# Altium PCB football_main_board_2016.PcbDoc
Units mm, origin at the board's own origin, x right, y up, seen from the top; angles counter-clockwise.
Board outline 100 x 50 mm, 2 copper layers (Top Layer, Bottom Layer), stack 1.571 mm thick; 106 components, 109 nets, 506 pads, 354 vias.
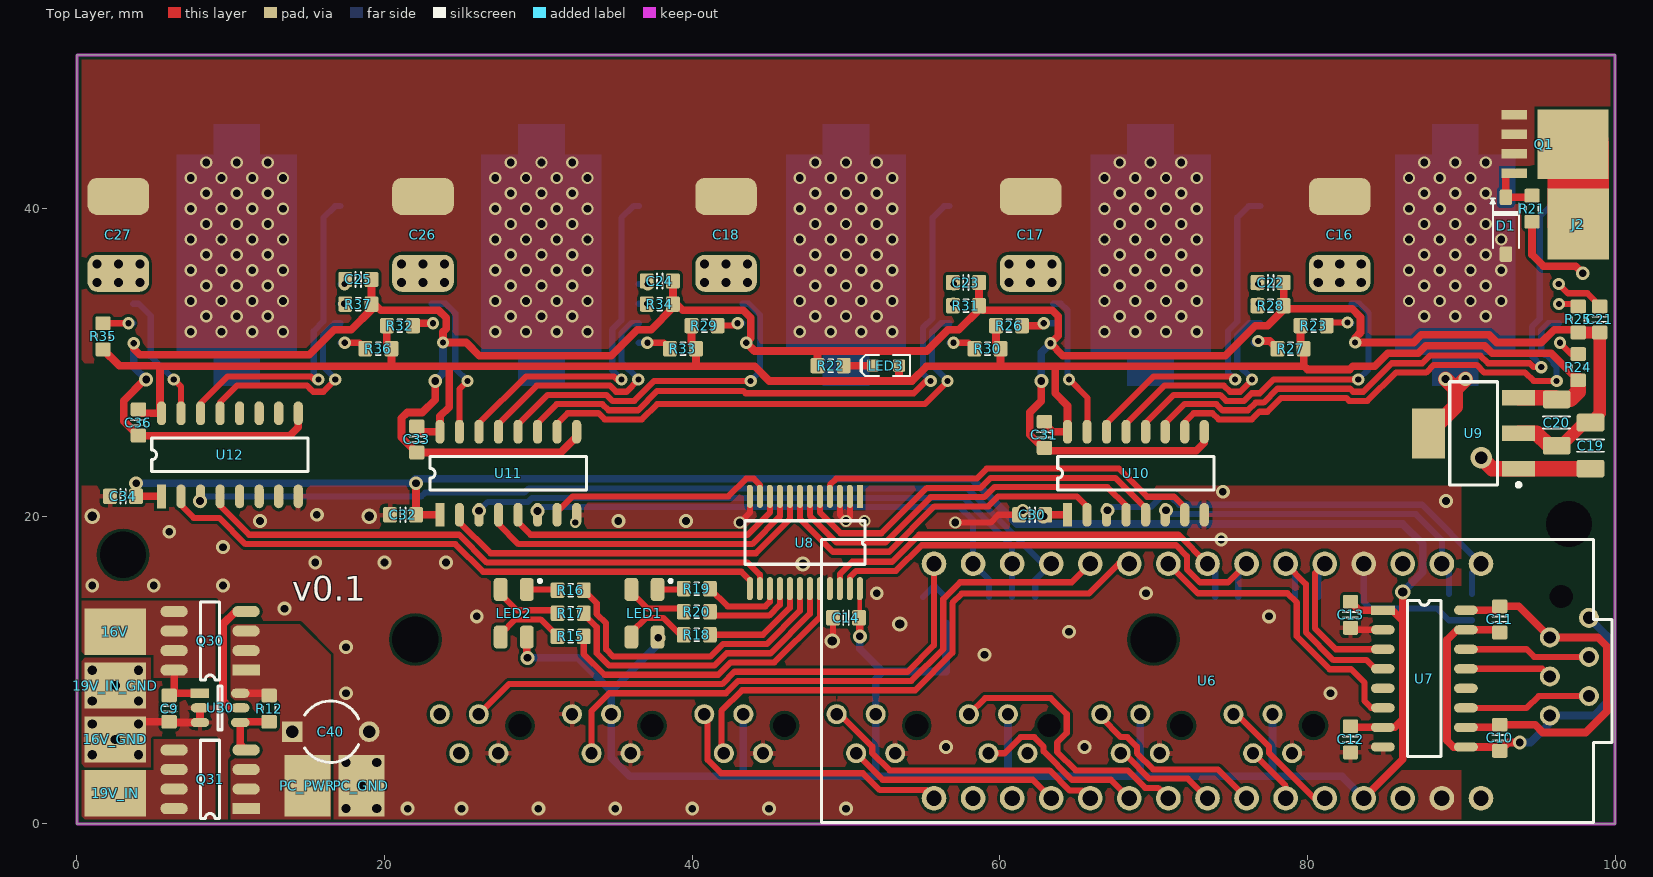
[diagram p0: Top Layer view]
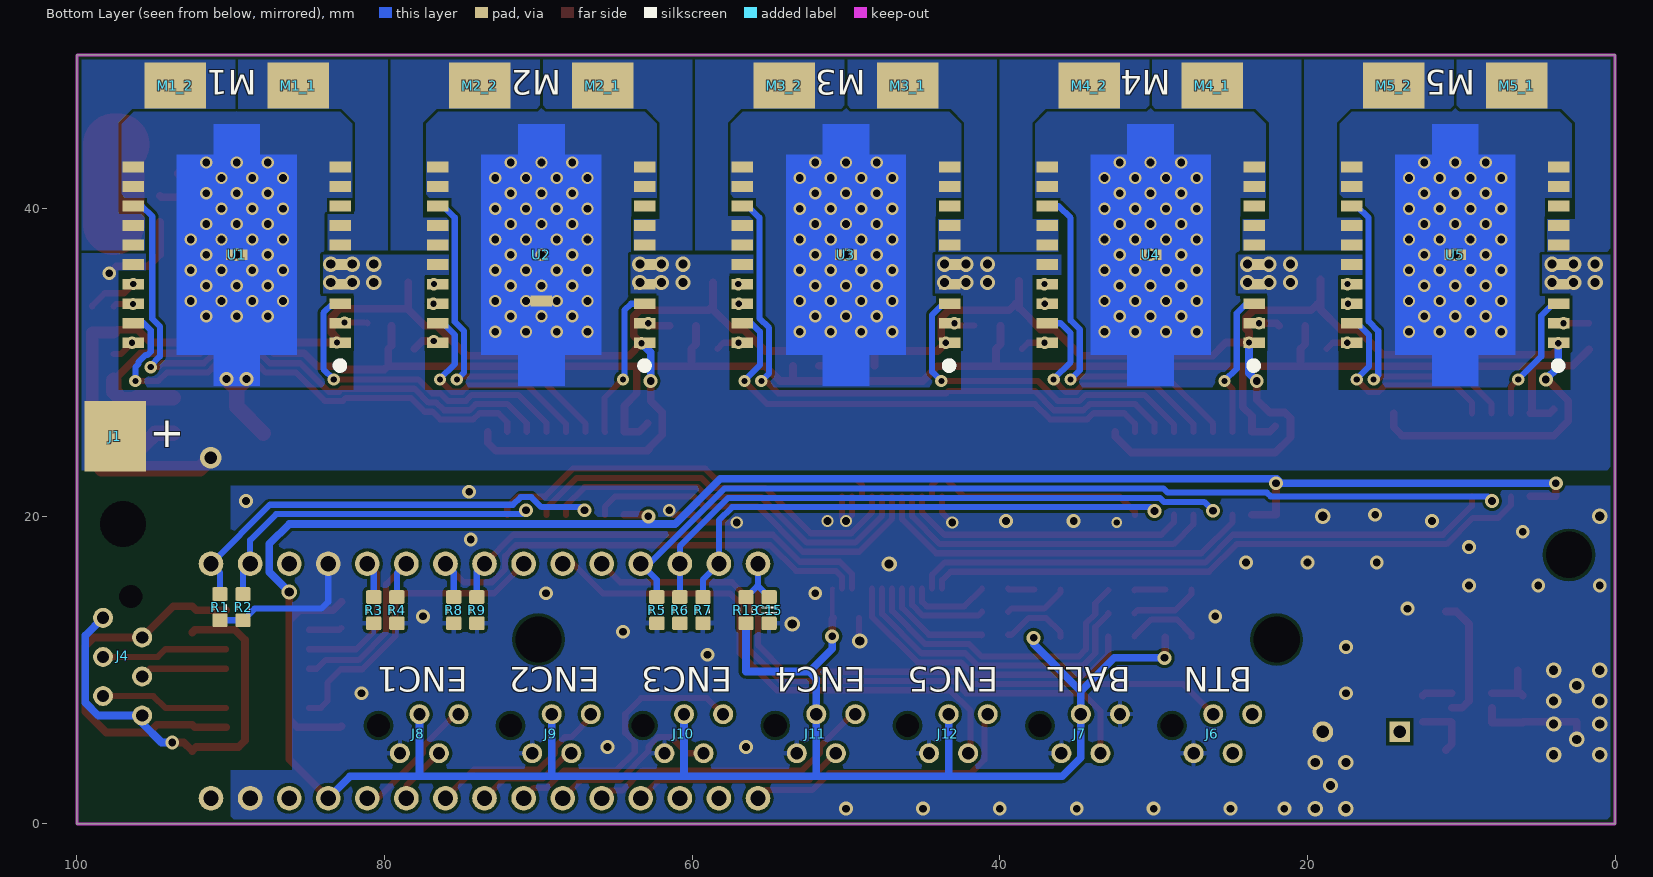
[diagram p1: Bottom Layer view, seen from below]

## Layer stack, top to bottom
Top Solder: solder mask 0.0102, Solder Resist, Dk 3.5
Top Layer: signal copper 0.0356
Dielectric 1: dielectric 1.5, FR-4, Dk 4.8
Bottom Layer: signal copper 0.0356
Bottom Solder: solder mask 0.0102, Solder Resist, Dk 3.5

## Board outline
0,0 100,0 100,50 0,50

## Design rules (kind name [scope] priority, off if disabled: settings)
Clearance [All] p1: gap=0.2
ComponentClearance ComponentClearanceIgnore [InComponent('U6') or InComponent('C40')] p1: gap=0 collisioncheckmode=3 verticalgap=0 showdistances=FALSE
ComponentClearance [All] p2: gap=0.2 collisioncheckmode=3 verticalgap=0.2 showdistances=FALSE
HoleSize [All] p1: absolutevalues=TRUE maxlimit=6 minlimit=0.3 maxpercent=80.000 minpercent=20.000
PolygonConnect DirectConnectPolygons [IsVia or InNet('NetM1_1_1') or InNet('NetM1_2_1') or InNet('NetM2_1_1') or InNet('NetM2_2_1') or InNet('NetM3_1_1') or InNet('NetM3_2_1') or InNet('NetM4_1_1') or InNet('NetM4_2_1') or InNet('NetM5_1_1') or InNet('NetM5_2_1') or InNet('12V') or InNet('PGND')or InNet('PC_PWR') or InNet('Net16V_1') or InNet('Net19V_IN_1') or InComponent('16V_GND') or InComponent('19V_IN_GND') or InComponent('PC_GND') or InComponent('C40') or InComponent('U6')] p1: connectstyle=Direct reliefconductorwidth=0.254 reliefentries=4 polygonreliefangle="90 Angle" airgapwidth=0.254
PolygonConnect [All] p2: connectstyle=Relief reliefconductorwidth=0.3 reliefentries=4 polygonreliefangle="90 Angle" airgapwidth=0.2
RoomDefinition football_main_board_2016 [InComponentClass('football_main_board_2016')] p1: confinementstyle=ConfineIn formatcopy=TRUE lockcomponents=FALSE outline 0,0 100,0 100,100 0,100
RoutingVias [All] p1: holewidth=0.4 width=0.8 viastyle="Through Hole" minholewidth=0.3 minwidth=0.6 maxholewidth=4 maxwidth=3
SolderMaskExpansion [All] p1: expansion=0.102
Width [All] p1: maxlimit=10 minlimit=0.2 preferedwidth=0.4
28 further rules are at their usual default settings.

## Components (designator, comment, footprint, x,y, rotation, side; value= is the part's Value field where it differs from the comment)
16V "HEADER-1" POWER-PAD-4x3#1 2.5,12.5 r180 top
16V_GND "HEADER-1" POWER-PAD-4x3#1 2.5,5.5 r0 top
19V_IN "HEADER-1" POWER-PAD-4x3#1 2.5,2 r0 top
19V_IN_GND "HEADER-1" POWER-PAD-4x3#1 2.5,9 r180 top
C9 "100n" CAPC1608X90N 6,7.5 r270 top
C10 "100n" CAPC1608X90N 92.5,5.6 r270 top
C11 "100n" CAPC1608X90N 92.5,13.3 r270 top
C12 "100n" CAPC1608X90N 82.8,5.5 r90 top
C13 "100n" CAPC1608X90N 82.8,13.6 r270 top
C14 "100n" CAPC1608X90N 50,13.4 r0 top
C15 "100n" CAPC1608X90N 55,13.9 r270 bottom
C16 "470u" CAP-LEADED-SMD-5 82.1,35.8 r180 top
C17 "470u" CAP-LEADED-SMD-5 62,35.8 r180 top
C18 "470u" CAP-LEADED-SMD-5 42.2,35.8 r180 top
C19 "10u" CAPC3216X180N 98.4,24.6 r90 top
C20 "10u" CAPC3216X180N 96.2,26.1 r270 top
C21 "1u" CAPC1608X90N 99,32.8 r270 top
C22 "1u" CAPC1608X90N 77.6,35.2 r0 top
C23 "1u" CAPC1608X90N 57.8,35.2 r0 top
C24 "1u" CAPC1608X90N 37.9,35.3 r0 top
C25 "1u" CAPC1608X90N 18.3,35.4 r0 top
C26 "470u" CAP-LEADED-SMD-5 22.5,35.8 r180 top
C27 "470u" CAP-LEADED-SMD-5 2.7,35.8 r180 top
C30 "100n" CAPC1608X90N 62.1,20.1 r180 top
C31 "100n" CAPC1608X90N 62.9,25.3 r270 top
C32 "100n" CAPC1608X90N 21.2,20.1 r180 top
C33 "100n" CAPC1608X90N 22.1,25 r270 top
C34 "100n" CAPC1608X90N 3,21.3 r180 top
C36 "100n" CAPC1608X90N 4,26.1 r270 top
C40 "470uF" CAPR5-4X5 16.5,6 r0 top
D1 "12V" SOD123 92.9,38.9 r270 top
J1 "12V_IN" POWER-PAD 97.5,25.2 r180 bottom
J2 "GND_IN" POWER-PAD 97.6,39 r180 top
J4 "COIL" MICRO-MATCH-6 98.3,13.4 r90 bottom
J6 "BTNS" MICRO-MATCH-4 27.4,4.6 r0 bottom
J7 "BALL" MICRO-MATCH-4 36,4.6 r0 bottom
J8 "ENC1" MICRO-MATCH-4 79,4.6 r0 bottom
J9 "ENC2" MICRO-MATCH-4 70.4,4.6 r0 bottom
J10 "ENC3" MICRO-MATCH-4 61.8,4.6 r0 bottom
J11 "ENC4" MICRO-MATCH-4 53.2,4.6 r0 bottom
J12 "ENC5" MICRO-MATCH-4 44.6,4.6 r0 bottom
LED1 "RGB-LED" RGB-LED 36.9,13.7 r270 top
LED2 "RGB-LED" RGB-LED 28.4,13.7 r270 top
LED3 "Green" LED-0603-GREEN 52.6,29.8 r180 top
M1_1 "HEADER-1" POWER-PAD-4x3#2 80.3,48.8 r180 bottom
M1_2 "HEADER-1" POWER-PAD-4x3#3 93.6,47.7 r180 bottom
M2_1 "HEADER-1" POWER-PAD-4x3#4 62,48 r180 bottom
M2_2 "HEADER-1" POWER-PAD-4x3#5 72.7,47.8 r0 bottom
M3_1 "HEADER-1" POWER-PAD-4x3#6 47.7,48.1 r180 bottom
M3_2 "HEADER-1" POWER-PAD-4x3#7 54.3,47.9 r0 bottom
M4_1 "HEADER-1" POWER-PAD-4x3#8 27.2,47.4 r180 bottom
M4_2 "HEADER-1" POWER-PAD-4x3#9 33.9,48 r0 bottom
M5_1 "HEADER-1" POWER-PAD-4x3#10 7.7,48 r180 bottom
M5_2 "HEADER-1" POWER-PAD-4x3#11 13.2,47.9 r0 bottom
PC_GND "HEADER-1" POWER-PAD-4x3#1 18.5,2.5 r270 top
PC_PWR "HEADER-1" POWER-PAD-4x3#1 15,2.5 r270 top
Q1 "MOSFET-N" SOT669 96.1,44.2 r0 top
Q30 "PMOS" SO8 11,10 r180 top
Q31 "PMOS" SO8 11,1 r180 top
R1 "10k" RESC1608X55N 90.7,14.1 r90 bottom
R2 "10k" RESC1608X55N 89.2,14.1 r90 bottom
R3 "10k" RESC1608X55N 80.7,13.9 r90 bottom
R4 "10k" RESC1608X55N 79.2,13.9 r90 bottom
R5 "10k" RESC1608X55N 62.3,13.9 r90 bottom
R6 "10k" RESC1608X55N 60.8,13.9 r90 bottom
R7 "10k" RESC1608X55N 59.3,13.9 r90 bottom
R8 "2k2" RESC1608X55N 75.5,13.9 r90 bottom
R9 "2k2" RESC1608X55N 74,13.9 r90 bottom
R12 "470k" RESC1608N_ZERO 12.5,7.5 r270 top
R13 "10k" RESC1608N_ZERO 56.5,13.9 r270 bottom
R15 "1k" RESC1608N_ZERO 32.1,12.2 r0 top
R16 "1k" RESC1608N_ZERO 32.1,15.2 r0 top
R17 "1k" RESC1608N_ZERO 32.1,13.7 r0 top
R18 "1k" RESC1608N_ZERO 40.3,12.3 r0 top
R19 "1k" RESC1608N_ZERO 40.3,15.3 r0 top
R20 "1k" RESC1608N_ZERO 40.3,13.8 r0 top
R21 "100k" RESC1608X55N 94.6,40 r90 top
R22 "2k2" RESC1608X55N 49,29.8 r180 top
R23 "10k" RESC1608X55N 80.4,32.4 r0 top
R24 "10k" RESC1608X55N 97.6,29.7 r90 top
R25 "10k" RESC1608X55N 97.6,32.8 r270 top
R26 "10k" RESC1608X55N 60.6,32.4 r0 top
R27 "10k" RESC1608X55N 78.9,30.9 r180 top
R28 "10k" RESC1608X55N 77.6,33.7 r0 top
R29 "10k" RESC1608X55N 40.8,32.4 r0 top
R30 "10k" RESC1608X55N 59.2,30.9 r180 top
R31 "10k" RESC1608X55N 57.8,33.7 r0 top
R32 "10k" RESC1608X55N 21,32.4 r0 top
R33 "10k" RESC1608X55N 39.4,30.9 r180 top
R34 "10k" RESC1608X55N 37.9,33.8 r0 top
R35 "10k" RESC1608X55N 1.7,31.7 r90 top
R36 "10k" RESC1608X55N 19.6,30.9 r180 top
R37 "10k" RESC1608X55N 18.3,33.8 r0 top
U1 "MC33886" MC33886#1 89.6,37 r0 bottom
U2 "MC33886" MC33886#2 69.8,37 r0 bottom
U3 "MC33886" MC33886#1 50,37 r0 bottom
U4 "MC33886" MC33886#1 30.2,37 r0 bottom
U5 "MC33886" MC33886#1 10.4,37 r0 bottom
U6 "NUCLEO-F303K8" NUCLEO-F303K8 73.5,9.3 r270 top
U7 "SI8641" SOIC16 84.9,13.9 r0 top
U8 "PCA9555" TSSOP24 50.9,21.3 r270 top
U9 "MIC5239" SOT230P700X180-4N 90.8,25.4 r180 top
U10 "SI8660" SOIC16 64.4,20.1 r90 top
U11 "SI8660" SOIC16 23.6,20.1 r90 top
U12 "SI8660" SOIC16 5.5,21.3 r90 top
U30 "LTC4412" TSOT-23-6 8,8.5 r0 top

## Footprints (in the part's own frame and the unit in brackets; to place one, negate y for a bottom-side part, rotate by r counter-clockwise, add the part's x,y. Pads: shape width x height; smd on the part's side, far side on the other; paste and mask are expansions set on the pad)
CAP-LEADED-SMD-5 [mm]
  rrect50% 4x2.4 smd: 1(0,0) 2(0,-5)
CAPC1608X90N [mm] "Chip Capacitor, Body 1.6x0.8mm, EIA 0603, IPC Medium Density"
  round 0.254 on Mech15: 0(0,0)
  rrect25% 0.9x1 smd: 1(-0.85,0) 2(0.85,0)
  Top Layer pour cut-out: -0.6,0.5 -0.4,0.7 0.4,0.7 0.6,0.5 0.6,-0.5 0.4,-0.7 -0.4,-0.7 -0.6,-0.5
  silkscreen extent -0.18,-0.48 0.18,0.48, body extent -0.85,-0.45 0.85,0.45, height 0.89
CAPC3216X180N [mm] "Chip Capacitor, Body 3.2x1.6mm, 1.8mm H, EIA 1206, IPC Medium Density"
  round 0.508 on Mech15: 0(0,0)
  rrect25% 1.15x1.8 smd: 1(-1.5,0) 2(1.5,0)
  silkscreen extent -0.4,-0.88 0.4,0.88, body extent -1.7,-0.9 1.7,0.9, height 1.8
CAPR5-4X5 [mm] "Capacitor; 2 Leads"
  rect 1.35x1.35 hole 0.8: 1(-2.5,0)
  round 1.35 hole 0.8: 2(2.5,0)
  silkscreen extent -1.69,-2 1.82,2
LED-0603-GREEN [mm]
  round 0.254 on Mech15: 0(0,0)
  rrect25% 0.8x0.8 smd: A(-0.85,0) K(0.85,0)
  Top Layer pour cut-out: -0.5,0.5 0.5,0.5 0.5,-0.5 -0.5,-0.5
  silkscreen extent -1.55,-0.67 1.68,0.67, body extent -0.8,-0.4 0.8,0.4, height 0.75
MC33886#1 [mm]
  rect 1.4x0.7 smd: 1(-6.731,5.715) 2(-6.731,4.445) 3(-6.731,3.175) 4(-6.731,1.905) 5(-6.731,0.635) 6(-6.731,-0.635) 7(-6.731,-1.905) 8(-6.731,-3.175) 9(-6.731,-4.445) 10(-6.731,-5.715) 11(6.731,-5.715) 12(6.731,-4.445) 13(6.731,-3.175) 14(6.731,-1.905) 15(6.731,-0.635) 16(6.731,0.635) 17(6.731,1.905) 18(6.731,3.175) 19(6.731,4.445) 20(6.731,5.715) 21(0,0)
  Top Layer region: -1.5,6.5 -1.5,8.5 1.5,8.5 1.5,6.5 3.9,6.5 3.9,-6.5 1.5,-6.5 1.5,-8.5 -1.5,-8.5 -1.5,-6.5 -3.9,-6.5 -3.9,6.5
  silkscreen extent -6.92,6.98 -6.48,7.42, body extent -7.12,-8 7.13,8, height 3.21
MC33886#2 [mm]
  rect 1.4x0.7 smd: 1(-6.731,5.715) 2(-6.731,4.445) 3(-6.731,3.175) 4(-6.731,1.905) 5(-6.731,0.635) 6(-6.731,-0.635) 7(-6.731,-1.905) 8(-6.731,-3.175) 9(-6.731,-4.445) 10(-6.731,-5.715) 11(6.731,-5.715) 12(6.731,-4.445) 13(6.731,-3.175) 14(6.731,-1.905) 15(6.731,-0.635) 16(6.731,0.635) 17(6.731,1.905) 18(6.731,3.175) 19(6.731,4.445) 20(6.731,5.715) 21(0,3)
  Top Layer region: -1.5,6.5 -1.5,8.5 1.5,8.5 1.5,6.5 3.9,6.5 3.9,-6.5 1.5,-6.5 1.5,-8.5 -1.5,-8.5 -1.5,-6.5 -3.9,-6.5 -3.9,6.5
  silkscreen extent -6.92,6.98 -6.48,7.42, body extent -7.12,-8 7.13,8, height 3.21
MICRO-MATCH-4 [mm]
  round 1.3 hole 0.8: 1(0,0) 2(-1.27,-2.54) 3(-2.54,0) 4(-3.81,-2.54)
  round 0 hole 1.5 unplated: drill(1.4,-1.8)
  body extent -5.41,-3.77 1.6,1.23, height 4
MICRO-MATCH-6 [mm]
  round 1.3 hole 0.8: 1(0,0) 2(-1.27,-2.54) 3(-2.54,0) 4(-3.81,-2.54) 5(-5.08,0) 6(-6.35,-2.54)
  round 0 hole 1.5 unplated: drill(1.4,-1.8)
  body extent -7.95,-3.77 1.6,1.23, height 4
NUCLEO-F303K8 [mm]
  round 1.6 hole 1: 1(-7.62,17.78) 2(-7.62,15.24) 3(-7.62,12.7) 4(-7.62,10.16) 5(-7.62,7.62) 6(-7.62,5.08) 7(-7.62,2.54) 8(-7.62,0) 9(-7.62,-2.54) 10(-7.62,-5.08) 11(-7.62,-7.62) 12(-7.62,-10.16) 13(-7.62,-12.7) 14(-7.62,-15.24) 15(-7.62,-17.78) 16(7.62,-17.78) 17(7.62,-15.24) 18(7.62,-12.7) 19(7.62,-10.16) 20(7.62,-7.62) 21(7.62,-5.08) 22(7.62,-2.54) 23(7.62,0) 24(7.62,2.54) 25(7.62,5.08) 26(7.62,7.62) 27(7.62,10.16) 28(7.62,12.7) 29(7.62,15.24) 30(7.62,17.78)
  silkscreen extent -9.2,-25.1 9.2,26.3
POWER-PAD [mm]
  rect 4x4.6 smd: 1(0,0)
POWER-PAD-4x3#1 [mm]
  rect 4x3 smd: 1(0,0)
POWER-PAD-4x3#2 [mm]
  rect 4x3 smd: 1(-5.3,-0.8)
POWER-PAD-4x3#3 [mm]
  rect 4x3 smd: 1(0,0.3)
POWER-PAD-4x3#4 [mm]
  rect 4x3 smd: 1(-3.8,0)
POWER-PAD-4x3#5 [mm]
  rect 4x3 smd: 1(1.1,-0.2)
POWER-PAD-4x3#6 [mm]
  rect 4x3 smd: 1(1.7,-0.1)
POWER-PAD-4x3#7 [mm]
  rect 4x3 smd: 1(-0.3,-0.1)
POWER-PAD-4x3#8 [mm]
  rect 4x3 smd: 1(1,0.6)
POWER-PAD-4x3#9 [mm]
  rect 4x3 smd: 1(0.3,0)
POWER-PAD-4x3#10 [mm]
  rect 4x3 smd: 1(1.3,0)
POWER-PAD-4x3#11 [mm]
  rect 4x3 smd: 1(1.2,-0.1)
RESC1608N_ZERO [mm] "Chip Resistor, Body 1.6x0.8mm, 0603, IPC Medium Density"
  round 0.254 on Mech15: 0(0,0)
  rrect25% 0.9x1 smd: 1(-0.85,0) 2(0.85,0)
  Top Layer pour cut-out: -0.6,0.5 -0.4,0.7 0.4,0.7 0.6,0.5 0.6,-0.5 0.4,-0.7 -0.4,-0.7 -0.6,-0.5
  silkscreen extent -0.15,-0.41 0.15,0.41, body extent -0.87,-0.47 0.88,0.48, height 0.54
RESC1608X55N [mm] "Chip Resistor, Body 1.6x0.8mm, EIA 0603, IPC Medium Density"
  round 0.254 on Mech15: 0(0,0)
  rrect25% 0.9x1 smd: 1(-0.85,0) 2(0.85,0)
  Top Layer pour cut-out: -0.6,0.5 -0.4,0.7 0.4,0.7 0.6,0.5 0.6,-0.5 0.4,-0.7 -0.4,-0.7 -0.6,-0.5
  silkscreen extent -0.15,-0.41 0.15,0.41, body extent -0.87,-0.47 0.88,0.48, height 0.54
RGB-LED [mm] "WURTH ELEKTRONIK 150141M173100"
  rrect50% 1.5x0.9 smd: 1(1.55,0.85) 2(1.55,-0.85) 3(-1.55,0.85) 4(-1.55,-0.85)
  silkscreen extent -2.2,1.6 -2,1.8, body extent -1.75,-1.4 1.75,1.4, height 1.91
SO8 [mm]
  rect 1.78x0.72 smd: 1(0,0)
  oval 1.78x0.72 smd: 2(0,-1.27) 3(0,-2.54) 4(0,-3.81) 5(4.68,-3.81) 6(4.68,-2.54) 7(4.68,-1.27) 8(4.68,0)
  silkscreen extent 1.72,-4.44 2.96,0.64, body extent -0.56,-4.35 5.21,0.55, height 1.46
SOD123 [mm] "SOD-123; 2 Leads; Body 2.7 x 1.6 mm, (LxW)"
  round 0.508 on Mech15: 0(0,0)
  rrect25% 1x0.8 smd: A(1.85,0) K(-1.85,0)
  silkscreen extent -1.75,-1 1.45,0.85, body extent -1.95,-0.9 1.95,0.9, height 1.18
SOIC16 [mm]
  rect 1.55x0.6 smd: 1(0,0)
  oval 1.55x0.6 smd: 2(0,-1.27) 3(0,-2.54) 4(0,-3.81) 5(0,-5.08) 6(0,-6.35) 7(0,-7.62) 8(0,-8.89) 9(5.4,-8.89) 10(5.4,-7.62) 11(5.4,-6.35) 12(5.4,-5.08) 13(5.4,-3.81) 14(5.4,-2.54) 15(5.4,-1.27) 16(5.4,0)
  silkscreen extent 1.61,-9.53 3.79,0.64, body extent -0.25,-9.42 5.66,0.57, height 1.46
SOT230P700X180-4N [mm] "SOT223, 4-Leads, Body 6,50x7,00mm (avg), Pitch 2,30mm, IPC Medium Density"
  rect 2.15x1 smd: 1(-2.925,2.3) 2(-2.925,0) 3(-2.925,-2.3)
  rect 2.15x3.25 smd: 4(2.925,0)
  silkscreen extent -3.05,-3.35 1.55,3.47, body extent -1.85,-3.35 1.85,3.35, height 1.8
SOT669 [mil]
  rect 182x178 smd: D(46,0)
  rect 65x24 smd: G(-104.33,-75) S(-104.33,-25) S(-104.33,25) S(-104.33,75)
  body extent -125,-99 135,97, height 43
TSOT-23-6 [mm]
  rect 1.2x0.6 smd: 1(0,0)
  oval 1.2x0.6 smd: 2(0,-0.95) 3(0,-1.9) 4(2.62,-1.9) 5(2.62,-0.95) 6(2.62,0)
  silkscreen extent 1.19,-2.38 1.43,0.48, body extent -0.07,-2.4 2.73,0.5, height 1.45
TSSOP24 [mm]
  rect 1.5x0.4 smd: 1(0,0)
  oval 1.5x0.4 smd: 2(0,-0.65) 3(0,-1.3) 4(0,-1.95) 5(0,-2.6) 6(0,-3.25) 7(0,-3.9) 8(0,-4.55) 9(0,-5.2) 10(0,-5.85) 11(0,-6.5) 12(0,-7.15) 13(6,-7.15) 14(6,-6.5) 15(6,-5.85) 16(6,-5.2) 17(6,-4.55) 18(6,-3.9) 19(6,-3.25) 20(6,-2.6) 21(6,-1.95) 22(6,-1.3) 23(6,-0.65) 24(6,0)
  silkscreen extent 1.58,-7.48 4.42,0.33, body extent -0.27,-7.53 6.28,0.37, height 1.2

## Part data
C9 C10 C11 C12 C13 C14 C15 C21 C22 C23 C24 C25 C30 C31 C32 C33 C34 C36: library part CAPC_10n_0603_X7R_50V_10%, "Capacitor SMD Cer 10nF 10% 50V X7R 0603"
C16 C17 C18 C26 C27: library part CAP-ELEC
C19 C20: library part CAPC_10u_1206_16V, "Capacitor SMD Cer 10uF 10% 16V X7R 1206"
C40: library part Cap2, "Capacitor"
D1: library part DIODE_ZENER_28V_500mW, "Diode Zener SMD 28V 0.5W SOD-123"
J1 J2: library part HEADER-1
J4: library part HEADER-6
J6 J7 J8 J9 J10 J11 J12: library part HEADER-4
LED3: library part LED_SMD_Green_0603_570nm, "LED 0603 SMD Green 570nm 50mcd 20mA"
R1 R2 R3 R4 R5 R6 R7 R8 R9: library part RES_10K_0603_1%, "Resistor SMD chip 10k Ohm 0.1W 1% 0603"
R12 R13 R15 R16 R17 R18 R19 R20: library part RES_0R_0603, "Resistor SMD chip 0.0 Ohm 0.1W 0603"
R21 R22 R23 R24 R25 R26 R27 R28 R29 R30 R31 R32 R33 R34 R35 R36 R37: library part RES_1K_0603_1%, "Resistor SMD chip 1k Ohm 0.1W 1% 0603"

## Free pads (board coordinates)
  round 0 hole 3 unplated: hole(3,17.5) hole(22,12) hole(70,12) hole(97,19.5)

## Via types
v1: diameter 0.8, hole 0.5, Top Layer to Bottom Layer, 209 vias
v2: diameter 0.9, hole 0.5, Top Layer to Bottom Layer, 52 vias
v3: diameter 1, hole 0.6, Top Layer to Bottom Layer, 51 vias
v4: diameter 0.8, hole 0.4, Top Layer to Bottom Layer, 40 vias
v5: diameter 0.7, hole 0.4, Top Layer to Bottom Layer, 1 vias
v6: diameter 1.4, hole 0.8, Top Layer to Bottom Layer, 1 vias

## Nets (pads, with @x,y where several pads share a name; then routed paths per layer and width w, separated by ;. In a path a pad name is that pad's centre, name@x,y a point inside that pad or via, vN(x,y) a via of type N, cw(c..) or ccw(c..) an arc to the next point about the centre after c; other vN are vias at no path point)
3.3V: U6.17
5V: C12.2 C13.1 C14.2 C30.1 C32.1 C34.1 J7.2 J8.2 J9.2 J10.2 J11.2 J12.2 LED1.1 LED2.1 R13.2 U6.27 U7.1 U7.7 U8.24 U10.1 U11.1 U12.1 | length 222.4
  Top Layer w0.3: C14.2 50.9,13.4 U8.24 U8.24@50.85,15.3
  Top Layer w0.5: v2(3.85,22.15) C34.1 U12.1 ; v2(22.05,22.15) C32.1 U11.1 ; LED2.1 29.25,10.85 v2(29.3,10.8) ; LED1.1 v2(37.8,12.1) ; C14.2 50.9,13.35 v2(50.9,12.2) ; v2(62.85,20) C30.1 U10.1 ; C12.2 82.87,6.28 U7.7 85.68,6.28 86.2,6.8 ; C13.1 83.35,13.9 U7.1 85.5,13.9 86.2,13.2 ; U6.27 86.2,4.22 86.2,6.8 ; v3(86.2,15.082) 86.2,13.2 ; 86.2,6.8 86.2,13.2
  Bottom Layer w0.5: v2(3.85,22.15) 21.7,22.15 v2@22,22.45 ; v2@22,22.2 v2(22.05,22.15) ; v2@22.05,22.45 58.169,22.45 61.119,19.5 86.2,19.5 87.49,18.21 87.49,16.392 87.5,16.382 v3(86.2,15.082) ; v2(29.3,10.8) 32.56,10.8 34.73,8.63 ; v2(37.8,12.1) 37.8,11.7 34.73,8.63 ; J12.2 43.33,3.17 43.4,3.1 ; v2(50.9,12.2) 50.9,11.4 52.39,9.91 ; R13.2 56.5,9.91 52.39,9.91 ; J10.2 60.53,3.13 60.5,3.1 ; J9.2 69.13,3.13 69.1,3.1 ; J8.2 77.73,3.13 77.7,3.1 ; U6.27 82.24,3.1 77.7,3.1 ; 34.73,8.63 34.73,4.314 35.944,3.1 43.4,3.1 ; 43.4,3.1 51.9,3.1 ; 51.9,3.1 60.5,3.1 ; 51.9,3.1 51.93,3.13 J11.2 51.93,9.45 52.39,9.91 ; 60.5,3.1 69.1,3.1 ; 69.1,3.1 77.7,3.1
12V: C16.1 C17.1 C18.1 C19.1 C26.1 C27.1 J1.1 R21.1 U1.4 U1.5 U1.16 U2.4 U2.5 U2.16 U3.4 U3.5 U3.16 U4.4 U4.5 U4.16 U5.4 U5.5 U5.16 U9.1 | length 13.3
  Top Layer w0.5: R21.1 94.6,37 95.35,36.25 97.45,36.25 v2(97.9,35.8)
  Top Layer w1: v6(91.3,23.8) 92,23.1 U9.1 C19.1
  other v3: 1.3,35.2 2.7,35.2 4.1,35.2 21.1,35.2 22.5,35.2 23.9,35.2 40.8,35.2 42.2,35.2 43.6,35.2 60.6,35.2 62,35.2 63.4,35.2 80.7,35.2 82.1,35.2 83.5,35.2 1.3,36.4 2.7,36.4 4.1,36.4 21.1,36.4 22.5,36.4 23.9,36.4 40.8,36.4 42.2,36.4 43.6,36.4 60.6,36.4 62,36.4 63.4,36.4 80.7,36.4 82.1,36.4 83.5,36.4
AGND: C19.2 C20.2 C21.2 C22.2 C23.2 C24.2 C25.2 C31.2 C33.2 C36.2 R22.2 R25.2 R28.2 R31.2 R34.2 R37.2 U1.1 U2.1 U3.1 U4.1 U5.1 U9.2 U10.9 U11.9 U12.9 | length 190.9
  Top Layer w0.5: v4(3.7,31.254) 3.7,30.9 4.1,30.5 15.1,30.5 16.735,32.135 17.835,32.135 19.15,33.45 R37.2 ; v2(4.5,28.9) 4.43,28.9 3.05,27.52 3.05,26.2 C36.2 13.85,25.25 14.39,25.79 U12.9 ; C25.2 R37.2 ; v2(23.3,28.8) 23.3,27.59 22.46,26.75 21.48,26.75 21.1,26.37 21.1,25.15 C33.2 31.45,24.15 32.49,25.19 U11.9 ; C24.2 R34.2 ; R22.2 48.15,30.7 48.2,30.75 ; C23.2 R31.2 ; v2(62.7,28.8) 62.7,27.5 61.95,26.75 61.95,25.3 62.813,24.437 62.813,24.362 62.9,24.275 72.775,24.275 73.29,24.79 U10.9 ; C22.2 R28.2 ; R25.2 97.415,32.135 96.035,32.135 95.2,31.3 92.3,31.3 91.8,31.8 87.4,31.8 86.9,31.3 v4(83.1,31.3) 83.1,31.6 83.45,31.95 83.45,32.952 82.902,33.5 78.65,33.5 R28.2 ; R37.2 19.35,33.8 19.745,33.405 23.507,33.405 24.005,32.907 24.005,32.203 23.8,31.998 v4(23.8,31.3) 25.3,31.3 26.15,30.45 34.748,30.45 36.433,32.135 37.335,32.135 38.75,33.55 R34.2 ; R34.2 39,33.8 39.395,33.405 43.307,33.405 43.805,32.907 43.805,31.575 v4(43.515,31.285) 44.05,30.75 48.2,30.75 ; 48.2,30.75 55.248,30.75 56.633,32.135 57.335,32.135 58.65,33.45 R31.2 ; R31.2 58.945,33.405 63.407,33.405 63.8,33.012 63.8,31.754 v4(63.3,31.254) 64.104,30.45 74.648,30.45 76.598,32.4 77.4,32.4 78.45,33.45 R28.2
  Top Layer w0.8: C20.2 96.5,24.6 98,26.1 C19.2 99,26.7 C21.2 R25.2
  Top Layer w1: U9.2 94.9,25.4 95.7,24.6 C20.2
  Bottom Layer w0.5: v4(3.7,31.254) 3.7,29.7 v2(4.5,28.9) ; v2(23.3,28.8) 23.8,29.3 v4(23.8,31.3) ; v2(62.7,28.8) 62.7,30.654 v4(63.3,31.254) ; v4(83.1,31.3) U1.1@83.2,31.4
BALL: J7.3 U6.11 | length 41
  Top Layer w0.4: J7.3 33.46,7.355 34.605,8.5 42.194,8.5 42.994,9.3 54.249,9.3 56.32,11.371 56.32,14.62 57.42,15.72 64.68,15.72 U6.11
BTN: C15.1 J6.2 R13.1 U6.15 | length 40.3
  Top Layer w0.4: J6.2 28.09,9.1 41.946,9.1 42.746,9.9 54,9.9 55.72,11.62 U6.15
  Bottom Layer w0.4: C15.1 55.72,15.47 ; U6.15 55.72,15.47 ; R13.1 55.78,15.47 55.72,15.47
CHARGE: R4.2 U6.6 U7.4 | length 13.4
  Top Layer w0.4: U6.6 79.9,15.6 79.9,12.451 81.691,10.66 83.84,10.66 84.41,10.09 U7.4
  Bottom Layer w0.4: U6.6 79.2,16.3 R4.2
COIL_5V: C10.1 C11.1 J4.2 U7.10 U7.16 | length 24.6
  Top Layer w0.5: U7.10 92.33,6.28 C10.1 94.804,6.45 95.304,5.95 98.086,5.95 99.45,7.314 99.45,11.55 98.87,12.13 J4.2 93.74,14.15 C11.1 92.25,13.9 U7.16
COIL_CHARGE: J4.4 U7.13 | length 5.7
  Top Layer w0.4: U7.13 95.26,10.09 J4.4
COIL_DONE: J4.5 U7.11 | length 8.3
  Top Layer w0.4: U7.11 94.25,7.55 95.02,8.32 J4.5
COIL_GND: C10.2 C11.2 J4.1 J4.6 U7.9 U7.15 | length 28.5
  Top Layer w0.5: C11.2 92.32,12.63 U7.15 89.73,12.63 89.075,11.975 89.075,5.425 89.49,5.01 U7.9 92.24,5.01 C10.2 93.05,5.3 v2(93.8,5.3)
  Bottom Layer w0.5: v2(93.8,5.3) 94.5,5.3 95.76,6.56 J4.6 98.6,7.05 99.45,7.9 99.45,12.25 J4.1
COIL_KICK: J4.3 U7.14 | length 8.2
  Top Layer w0.4: U7.14 94.24,11.36 94.74,10.86 J4.3
DIR1_1: U8.5 U10.5 | length 25.5
  Top Layer w0.4: U8.5 48.3,20.251 49.651,18.9 52.306,18.9 55.256,21.85 58.753,21.85 59.403,22.5 67.5,22.5 69.48,20.52 U10.5
DIR1_1_D: U1.3 U10.12 | length 21.9
  Top Layer w0.4: U10.12 69.48,26.08 71.3,27.9 74.32,27.9 74.72,27.5 75.88,27.5 76.38,28 76.9,28 77.8,28.9 v4(83.3,28.9)
  Bottom Layer w0.4: U1.3 83.375,33.825 83.969,33.231 83.969,29.569 v4(83.3,28.9)
DIR1_2: U8.4 U10.7 | length 25.8
  Top Layer w0.4: U8.4 48.95,22.049 49.351,22.45 58.504,22.45 59.154,23.1 67.749,23.1 69.574,21.275 71.325,21.275 72.02,20.58 U10.7
DIR1_2_D: U1.19 U10.10 | length 32.4
  Top Layer w0.4: U10.10 72.02,26.12 72.6,26.7 73.823,26.7 74.223,26.3 76.377,26.3 76.877,26.8 77.397,26.8 78.297,27.7 82.52,27.7 82.72,27.5 83.9,27.5 85.75,29.35 87.708,29.35 88.208,29.85 90.992,29.85 91.492,29.35 94.15,29.35 94.7,28.8 v4(96.2,28.8)
  Bottom Layer w0.4: v4(96.2,28.8) 96.2,29.7 96,29.9 96,30.031 95.531,30.5 95.4,30.5 95.2,30.7 95.2,32.1 95.655,32.555 U1.19
DIR2_1: U8.7 U10.2 | length 23.3
  Top Layer w0.4: U8.7 47,19.854 49.154,17.7 52.803,17.7 55.753,20.65 59.25,20.65 59.9,21.3 65,21.3 65.67,20.63 U10.2
DIR2_1_D: U2.3 U10.15 | length 9.6
  Top Layer w0.4: v4(64.5,28.9) 65.7,27.7 65.7,25.53 U10.15
  Bottom Layer w0.4: U2.3@63.469,33.825 63.975,33.825 64.4,33.4 64.4,29 v4(64.5,28.9)
DIR2_2: U8.6 U10.4 | length 25.1
  Top Layer w0.4: U8.6 47.65,20.053 49.403,18.3 52.554,18.3 55.504,21.25 59.001,21.25 59.651,21.9 67,21.9 68.21,20.69 U10.4
DIR2_2_D: U2.19 U10.13 | length 15.4
  Top Layer w0.4: U10.13 68.21,26.01 70.7,28.5 74.569,28.5 74.969,28.1 75.631,28.1 76.4,28.869 v4(76.4,28.9)
  Bottom Layer w0.4: v4(76.4,28.9) 76.4,28.931 75.431,29.9 75.431,31.801 76.185,32.555 U2.19@76.931,32.555
DIR3_1: U8.10 U11.5 | length 18.8
  Top Layer w0.4: U11.5 28.68,19.62 29.5,18.8 43.6,18.8 45.05,20.25 U8.10
DIR3_1_D: U3.3 U11.12 | length 23.1
  Top Layer w0.4: U11.12 28.68,25.98 30.6,27.9 34.41,27.9 34.81,27.5 36.231,27.5 37.531,28.8 v4(43.8,28.8)
  Bottom Layer w0.4: U3.3 43.675,33.825 44.4,33.1 44.4,29.4 v4(43.8,28.8)
DIR3_2: U8.11 U11.7 | length 15.2
  Top Layer w0.4: U11.7 31.22,20.295 32.225,21.3 42.351,21.3 43.501,22.45 43.999,22.45 44.4,22.049 U8.11
DIR3_2_D: U3.19 U11.10 | length 32.4
  Top Layer w0.4: U11.10 31.22,26.02 31.9,26.7 33.913,26.7 34.313,26.3 36.728,26.3 37.728,27.3 55.131,27.3 56.6,28.769 v4(56.6,28.8)
  Bottom Layer w0.4: v4(56.6,28.8) 56.6,28.831 55.6,29.831 55.6,32 56.155,32.555 U3.19
DIR4_1: U8.8 U11.2 | length 25.2
  Top Layer w0.4: U11.2 24.87,19.63 26.9,17.6 44.149,17.6 46.35,19.801 U8.8
DIR4_1_D: U4.3 U11.15 | length 10
  Top Layer w0.4: U11.15 24.87,28.27 v4(25.4,28.8)
  Bottom Layer w0.4: U4.3@23.069,33.825 U4.3@23.415,33.825 ; U4.3 23.975,33.825 24.6,33.2 24.6,29.6 v4(25.4,28.8)
DIR4_2: U8.9 U11.4 | length 21.5
  Top Layer w0.4: U11.4 27.41,19.49 28.7,18.2 43.9,18.2 45.7,20 U8.9
DIR4_2_D: U4.19 U11.13 | length 16
  Top Layer w0.4: U11.13 27.41,26.01 29.9,28.5 34.658,28.5 35.058,28.1 35.731,28.1 36.5,28.868 v4(36.5,28.9)
  Bottom Layer w0.4: v4(36.5,28.9) 36.5,28.931 35.4,30.031 35.4,31.9 36.055,32.555 U4.19@36.531,32.555
DIR5_1: U8.13 U12.2 | length 40.1
  Top Layer w0.4: U12.2 6.77,20.73 7.6,19.9 9.251,19.9 10.951,18.2 24.603,18.2 26.403,16.4 43.2,16.4 43.75,15.85 U8.13
DIR5_1_D: U5.3 U12.15 | length 8.6
  Top Layer w0.4: v4(6.3,28.9) 6.77,28.43 U12.15
  Bottom Layer w0.4: U5.3 4.015,33.825 4.8,33.04 4.8,30.4 v4(6.3,28.9)
DIR5_2: U8.14 U12.4 | length 38.5
  Top Layer w0.4: U12.4 9.31,20.69 11.2,18.8 24.851,18.8 26.651,17 43.6,17 44.4,16.2 U8.14
DIR5_2_D: U5.19 U12.13 | length 14
  Top Layer w0.4: U12.13 9.31,27.41 10.4,28.5 14.961,28.5 15.161,28.3 15.169,28.3 15.369,28.1 16.031,28.1 16.8,28.869 v4(16.8,28.9)
  Bottom Layer w0.4: v4@17,28.9 v4(16.8,28.9) 16.8,28.931 16,29.731 16,31.8 16.755,32.555 U5.19
DONE: U6.9 U7.6 | length 19.8
  Top Layer w0.4: U6.9 70.96,16.914 72.874,15 78.7,15 79.3,14.4 79.3,12.203 81.443,10.06 82.84,10.06 83.7,9.2 83.7,8.001 84.151,7.55 U7.6
ENC1A: J8.3 U6.25 | length 3.8
  Top Layer w0.4: J8.3 78.58,2.48 U6.25
ENC1B: J8.4 U6.26 | length 8.4
  Top Layer w0.4: J8.4 75.405,7.14 77.51,5.035 77.51,4.605 80.435,1.68 U6.26
ENC2A: J9.3 U6.23 | length 6.9
  Top Layer w0.4: J9.3 68.2,4.6 68.31,4.49 68.31,4.357 69.717,2.95 72.23,2.95 U6.23
ENC2B: J9.4 U6.24 | length 12.1
  Top Layer w0.4: J9.4 66.59,6.925 67.865,5.65 68.295,5.65 68.91,5.035 68.91,4.605 69.965,3.55 74.17,3.55 U6.24
ENC3A: J10.3 U6.21 | length 11.4
  Top Layer w0.4: J10.3 60.315,4.6 61.365,5.65 62.235,5.65 62.85,5.035 62.85,4.716 64.686,2.88 67.22,2.88 U6.21
ENC3B: J10.4 U6.22 | length 18.4
  Top Layer w0.4: J10.4 59.04,8.19 63.31,8.19 64.35,7.15 64.35,5.924 63.734,5.308 63.734,4.68 64.934,3.48 68.317,3.48 69.447,2.35 70.29,2.35 U6.22
ENC4A: J11.3 U6.19 | length 13.9
  Top Layer w0.4: J11.3 52.38,2.88 62.14,2.88 U6.19
ENC4B: J11.4 U6.20 | length 19
  Top Layer w0.4: J11.4 49.605,7.14 51.71,5.035 51.71,4.605 52.835,3.48 63.237,3.48 64.54,2.177 65.383,2.177 U6.20
ENC5A: J12.3 U6.10 | length 35.2
  Top Layer w0.4: J12.3 41.9,4.76 41.9,7.357 43.243,8.7 54.497,8.7 56.92,11.123 56.92,14.371 57.529,14.98 65.78,14.98 67.72,16.92 U6.10
ENC5B: J12.4 U6.16 | length 18.8
  Top Layer w0.4: J12.4 41,6.93 41,4.175 41.875,3.3 51.1,3.3 52.2,2.2 55.2,2.2 U6.16
GND: 16V_GND.1 19V_IN_GND.1 C9.2 C12.1 C13.2 C14.1 C15.2 C30.2 C32.2 C34.2 C40.2 J6.1 J7.1 J7.4 J8.1 J9.1 J10.1 J11.1 J12.1 PC_GND.1 R1.1 R2.1 R3.1 R4.1 R5.1 R6.1 R7.1 R8.1 R9.1 U6.4 U6.29 U7.2 U7.8 U8.2 U8.3 U8.12 U8.21 U10.8 U11.8 U12.8 U30.2 U30.3 | length 31.1
  Top Layer w0.4: v1(43.1,19.6) 43.75,20.25 U8.12 ; v3(49.1,11.9) 49.15,11.95 C14.1 ; U8.3 49.6,20.1 v1(50,19.7) 50.25,19.95 U8.2 ; v1(57.1,19.6) 59.4,19.6 59.9,20.1 C30.2 ; C13.2 82.92,12.63 U7.2
  Top Layer w0.5: v3(2.5,5.5) 2.5,6.65 C9.2 6,6.6 U30.3 U30.2
  Bottom Layer w0.4: U6.4 83.66,14.44 84.1,14 88.45,14 R2.1 R1.1
  other v1: 51.2,19.7 61.5,20.4
  other v2: 21.5,1 25,1 30,1 35,1 40,1 45,1 50,1 56.5,5 65.5,5 17.5,8.5 81.5,8.5 59,11 17.5,11.5 64.5,12.5 26,13.5 77.5,13.5 13.5,14 52,15 69.5,15 1,15.5 5,15.5 9.5,15.5 15.5,17 20,17 24,17 9.5,18 74.4,18.5 6,19 11.9,19.7 35.2,19.7 39.6,19.7 15.6,20.1 89,21 74.5,21.6
  other v3: 17.5,1 19.5,1 18.5,2.5 17.5,4 19.5,4 1,4.5 4,4.5 1,6.5 4,6.5 1,8 4,8 2.5,9 1,10 4,10 53.5,13 47.2,16.9 1,20 19,20
  other v5: 32.4,19.6
KICK: R3.2 U6.5 U7.3 | length 11.8
  Top Layer w0.4: U6.5 80.5,16.3 80.5,12.7 81.84,11.36 U7.3
  Bottom Layer w0.4: R3.2 80.7,16.5 U6.5
LED1B: R18.2 U8.17 | length 7.2
  Top Layer w0.4: R18.2@41.2,12.25 R18.2 44.6,12.3 46.35,14.05 U8.17
LED1G: R20.2 U8.16 | length 6
  Top Layer w0.4: R20.2 41.4,13.55 44.999,13.55 45.7,14.251 U8.16
LED1R: R19.2 U8.15 | length 5.4
  Top Layer w0.4: R19.2 42.3,14.15 44.75,14.15 45.05,14.45 U8.15
LED2B: R15.2 U8.20 | length 20.5
  Top Layer w0.4: R15.2 32.95,11.05 34.3,9.7 41.697,9.7 42.497,10.5 45.346,10.5 48.3,13.454 U8.20
LED2G: R17.2 U8.19 | length 20.2
  Top Layer w0.4: R17.2 32.95,13.65 33.8,12.8 33.8,11.1 34.6,10.3 41.449,10.3 42.249,11.1 45.097,11.1 47.65,13.653 U8.19
LED2R: R16.2 U8.18 | length 19.9
  Top Layer w0.4: R16.2 33.8,14.35 33.8,13.648 34.4,13.048 34.4,11.349 34.849,10.9 41.2,10.9 42,11.7 44.849,11.7 47,13.851 U8.18
Net16V_1: 16V.1 C9.1 Q30.5 Q30.6 Q30.7 Q30.8 U30.1 | length 3.6
  Top Layer w0.5: C9.1 C9.1@6.15,8.5 ; Q30.8 6.32,8.67 C9.1@6.15,8.5 ; U30.1 C9.1@6.15,8.5
Net19V_IN_1: 19V_IN.1 Q31.5 Q31.6 Q31.7 Q31.8
NetC21_1: C21.1 U1.17 | length 3.3
  Top Layer w0.4: v4(96.331,35.1) 96.931,34.5 98.2,34.5 99,33.7 C21.1
  Bottom Layer w0.4: U1.17 v4(96.331,35.1)
NetC22_1: C22.1 U2.17 | length 0.3
  Bottom Layer w0.5: U2.17 v4(76.795,35.095)
NetC23_1: C23.1 U3.17 | length 0.3
  Bottom Layer w0.4: U3.17 v4(57.005,35.095)
NetC24_1: C24.1 U4.17 | length 0.3
  Bottom Layer w0.4: U4.17@36.531,35.095 U4.17@36.805,35.095
  other v4: 37.105,35.095
NetC25_1: C25.1 U5.17 | length 0.3
  Bottom Layer w0.4: U5.17 v4(17.395,35.095)
NetD1_K: D1.K Q1.G R21.2 | length 3.7
  Top Layer w0.5: Q1.G 93.095,42.295 92.9,42.1 D1.K 94.5,40.75 R21.2
NetJ2_1: J2.1 Q1.D | length 5.5
  Top Layer w4: Q1.D 97.6,44.2 J2.1
NetLED1_2: LED1.2 R18.1 | length 4.5
  Top Layer w0.4: LED1.2 36.05,12.45 37,13.4 38.134,13.4 39.234,12.3 R18.1
NetLED1_3: LED1.3 R19.1 | length 1.7
  Top Layer w0.4: LED1.3 39.4,15.25 R19.1
NetLED1_4: LED1.4 R20.1 | length 4.1
  Top Layer w0.4: LED1.4 36.05,15.05 37.1,14 39.25,14 R20.1
NetLED2_2: LED2.2 R15.1 | length 4.7
  Top Layer w0.4: LED2.2 27.55,12.35 28.5,13.3 30.15,13.3 R15.1
NetLED2_3: LED2.3 R16.1 | length 2
  Top Layer w0.4: LED2.3 31.2,15.25 R16.1
NetLED2_4: LED2.4 R17.1 | length 4.5
  Top Layer w0.4: LED2.4 27.55,14.95 28.6,13.9 31.05,13.9 R17.1
NetLED3_K: LED3.K R22.1 | length 1.9
  Top Layer w0.5: R22.1 LED3.K
NetM1_1_1: M1_1.1 U1.6 U1.7
NetM1_2_1: M1_2.1 U1.14 U1.15
NetM2_1_1: M2_1.1 U2.6 U2.7
NetM2_2_1: M2_2.1 U2.14 U2.15
NetM3_1_1: M3_1.1 U3.6 U3.7
NetM3_2_1: M3_2.1 U3.14 U3.15
NetM4_1_1: M4_1.1 U4.6 U4.7
NetM4_2_1: M4_2.1 U4.14 U4.15
NetM5_1_1: M5_1.1 U5.6 U5.7
NetM5_2_1: M5_2.1 U5.14 U5.15
NetQ30_4: Q30.4 U30.5 | length 8.1
  Top Layer w0.5: U30.5 9.95,7.55 9.5,8 9.5,13 10.31,13.81 Q30.4
NetQ31_4: Q31.4 R12.2 U30.4 | length 3.8
  Top Layer w0.5: Q31.4 10.62,5.19 U30.4 10.67,6.65 R12.2
NetR23_2: R23.2 U1.2 | length 1.7
  Top Layer w0.4: R23.2@81.1,32.55 R23.2@81.15,32.6 ; R23.2@81.35,32.6 v4(82.6,32.6)
  Bottom Layer w0.4: U1.2@82.5,32.6 v4(82.6,32.6) 82.824,32.6 U1.2
NetR24_2: R24.2 U1.20 | length 1.6
  Top Layer w0.4: v4(96.415,31.285) 97.15,30.55 R24.2
  Bottom Layer w0.4: U1.20 v4(96.415,31.285)
NetR25_1: R25.1 U1.18 | length 1.3
  Top Layer w0.4: v4(96.356,33.8) 97.45,33.8 R25.1
  Bottom Layer w0.4: U1.18 v4(96.356,33.8)
NetR26_2: R26.2 U2.2 | length 1.9
  Top Layer w0.5: R26.2 62.7,32.4 v4(62.855,32.555)
  Bottom Layer w0.4: U2.2@63.055,32.555 U2.2 U2.2@63.469,32.555
NetR27_2: R27.2 U2.20 | length 1.8
  Top Layer w0.5: v4(76.8,31.4) 77.55,31.4 R27.2
  Bottom Layer w0.5: U2.20 76.646,31.4 v4(76.8,31.4)
NetR28_1: R28.1 U2.18 | length 0.3
  Bottom Layer w0.5: U2.18 v4(76.825,33.825)
NetR29_2: R29.2 U3.2 | length 1.7
  Top Layer w0.4: R29.2 42.8,32.4 v4(42.955,32.555)
  Bottom Layer w0.4: v4(42.955,32.555) U3.2
NetR30_2: R30.2 U3.20 | length 1.8
  Top Layer w0.4: v4(56.985,31.285) 57.965,31.285 R30.2
  Bottom Layer w0.4: U3.20 v4(56.985,31.285)
NetR31_1: R31.1 U3.18 | length 0.2
  Bottom Layer w0.4: U3.18 v4(56.975,33.825)
NetR32_2: R32.2 U4.2 | length 1.4
  Top Layer w0.5: R32.2 22.005,32.555 v4(23.155,32.555)
NetR33_2: R33.2 U4.20 | length 1.9
  Top Layer w0.4: v4(37.085,31.285) 38.165,31.285 R33.2
  Bottom Layer w0.4: U4.20@36.531,31.285 U4.20@36.785,31.285
NetR34_1: R34.1 U4.18 | length 0.2
  Bottom Layer w0.4: U4.18@36.531,33.825 U4.18@36.775,33.825
  other v4: 37.075,33.825
NetR35_2: R35.2 U5.2 | length 2
  Top Layer w0.4: R35.2 1.705,32.555 v4(3.355,32.555)
  Bottom Layer w0.4: v4(3.355,32.555) U5.2
NetR36_2: R36.2 U5.20 | length 1.8
  Top Layer w0.4: v4(17.415,31.285) 18.365,31.285 R36.2
  Bottom Layer w0.4: U5.20 v4(17.415,31.285)
NetR37_1: R37.1 U5.18 | length 0.2
  Bottom Layer w0.4: U5.18 v4(17.375,33.825)
P5V: C20.1 C31.1 C33.1 C36.1 LED3.A R23.1 R24.1 R26.1 R27.1 R29.1 R30.1 R32.1 R33.1 R35.1 R36.1 U9.3 U10.16 U11.16 U12.16 | length 132.7
  Top Layer w0.5: R35.1 2.769,29.781 4.108,29.781 4.127,29.8 4.873,29.8 4.892,29.781 5.3,29.781 ; C36.1 4.25,26.7 U12.16 5.4,26.8 5.4,29.681 5.331,29.75 20.4,29.75 ; R32.1 20.15,31.2 R36.1 20.45,29.8 20.4,29.75 ; C33.1 22.45,25.5 U11.16 23.6,26.5 24.2,27.1 24.2,29.75 ; 36.852,29.75 24.2,29.75 ; 36.852,29.75 40.3,29.75 ; R29.1 39.95,31.2 R33.1 40.25,29.8 40.3,29.75 ; LED3.A 53.45,28.85 53.5,28.8 ; R26.1 59.75,31.2 R30.1 60.05,29.8 60,29.75 ; C31.1@62.9,26.05 63.45,25.5 U10.16 64.4,27.2 63.6,28 63.6,29.6 ; R23.1 79.55,31.1 R27.1 79.75,29.8 80,29.55 82.748,29.55 82.948,29.75 84.362,29.75 85.212,30.6 87.19,30.6 87.69,31.1 91.51,31.1 92.01,30.6 95.85,30.6 R24.1 ; 79.7,29.75 60,29.75 ; 20.4,29.75 24.2,29.75 ; 40.3,29.75 42.65,29.75 44.06,29.75 45.01,28.8 53.5,28.8 ; 53.5,28.8 54.288,28.8 55.238,29.75 60,29.75
  Top Layer w1: U9.3 96.1,27.7 C20.1 97.1,27.6 97.6,28.1 R24.1
PC_PWR: C40.1 PC_PWR.1 Q30.1 Q30.2 Q30.3 Q31.1 Q31.2 Q31.3 R12.1 U30.6 | length 1.9
  Top Layer w0.5: U30.6 12.35,8.5 R12.1
PGND: C16.2 C17.2 C18.2 C26.2 C27.2 D1.A Q1.S U1.9 U1.10 U1.11 U1.12 U1.21 U2.9 U2.10 U2.11 U2.12 U2.21 U3.9 U3.10 U3.11 U3.12 U3.21 U4.9 U4.10 U4.11 U4.12 U4.21 U5.9 U5.10 U5.11 U5.12 U5.21 U9.4 | length 5.5
  Top Layer w1: U9.4 89.6,27.125 89.6,28.25 ; v2(88.975,28.925) 89.6,28.3 89.6,28.25 ; v2(90.275,28.925) 89.6,28.25
  other v1: 7.4,32 9.4,32 11.4,32 13.4,32 27.2,32 29.2,32 31.2,32 33.2,32 47,32 49,32 51,32 53,32 66.8,32 68.8,32 70.8,32 72.8,32 8.4,33 10.4,33 12.4,33 28.2,33 30.2,33 32.2,33 48,33 50,33 52,33 67.8,33 69.8,33 71.8,33 87.6,33 89.6,33 91.6,33 7.4,34 9.4,34 11.4,34 13.4,34 27.2,34 29.2,34 31.2,34 33.2,34 47,34 49,34 51,34 53,34 66.8,34 68.8,34 70.8,34 72.8,34 86.6,34 88.6,34 90.6,34 92.6,34 8.4,35 10.4,35 12.4,35 28.2,35 30.2,35 32.2,35 48,35 50,35 52,35 67.8,35 69.8,35 71.8,35 87.6,35 89.6,35 91.6,35 7.4,36 9.4,36 11.4,36 13.4,36 27.2,36 29.2,36 31.2,36 33.2,36 47,36 49,36 51,36 53,36 66.8,36 68.8,36 70.8,36 72.8,36 86.6,36 88.6,36 90.6,36 92.6,36 8.4,37 10.4,37 12.4,37 28.2,37 30.2,37 32.2,37 48,37 50,37 52,37 67.8,37 69.8,37 71.8,37 87.6,37 89.6,37 91.6,37 7.4,38 9.4,38 11.4,38 13.4,38 27.2,38 29.2,38 31.2,38 33.2,38 47,38 49,38 51,38 53,38 66.8,38 68.8,38 70.8,38 72.8,38 86.6,38 88.6,38 90.6,38 92.6,38 8.4,39 10.4,39 12.4,39 28.2,39 30.2,39 32.2,39 48,39 50,39 52,39 67.8,39 69.8,39 71.8,39 87.6,39 89.6,39 91.6,39 7.4,40 9.4,40 11.4,40 13.4,40 27.2,40 29.2,40 31.2,40 33.2,40 47,40 49,40 51,40 53,40 66.8,40 68.8,40 70.8,40 72.8,40 86.6,40 88.6,40 90.6,40 8.4,41 10.4,41 12.4,41 28.2,41 30.2,41 32.2,41 48,41 50,41 52,41 67.8,41 69.8,41 71.8,41 87.6,41 89.6,41 91.6,41 7.4,42 9.4,42 11.4,42 13.4,42 27.2,42 29.2,42 31.2,42 33.2,42 47,42 49,42 51,42 53,42 66.8,42 68.8,42 70.8,42 72.8,42 86.6,42 88.6,42 90.6,42 8.4,43 10.4,43 12.4,43 28.2,43 30.2,43 32.2,43 48,43 50,43 52,43 67.8,43 69.8,43 71.8,43 87.6,43 89.6,43 91.6,43
PWM1: R2.2 U6.2 U10.6 | length 22.4
  Bottom Layer w0.4: v2(70.8,20.4) 71.05,20.15 87.05,20.15 88.74,18.46 U6.2 89.2,16.46 R2.2
PWM1_D: U1.13 U10.11 | length 39.4
  Top Layer w0.4: U10.11 70.75,26.05 72,27.3 74.072,27.3 74.472,26.9 76.128,26.9 76.628,27.4 77.149,27.4 78.049,28.3 82.769,28.3 82.969,28.1 83.631,28.1 85.481,29.95 87.459,29.95 87.959,30.45 91.241,30.45 91.741,29.95 94.45,29.95 94.7,29.7 v4(95.2,29.7)
  Bottom Layer w0.4: v4(95.2,29.7) v4@95.2,29.8 ; v4@95.2,29.8 94.6,30.4 94.6,32.349 95.1,32.849 95.1,39.5 95.775,40.175 U1.13
PWM2: R1.2 U6.1 U10.3 | length 28.6
  Bottom Layer w0.4: v2(67,20.4) 67.2,20.6 69.798,20.6 70.448,21.25 71.152,21.25 71.652,20.75 87.45,20.75 U6.1 90.7,16.34 R1.2
PWM2_D: U2.13 U10.14 | length 23
  Top Layer w0.4: U10.14 66.94,26.04 70,29.1 75.1,29.1 v4(75.3,28.9)
  Bottom Layer w0.4: v4(75.3,28.9) 74.831,29.369 74.831,32.049 75.431,32.649 75.431,39.421 76.185,40.175 U2.13@76.931,40.175
PWM3: R7.2 U6.14 U11.6 | length 34.4
  Top Layer w0.4: U11.6 v2(29.95,20.35)
  Bottom Layer w0.4: v2(29.95,20.35) 30.2,20.6 57.403,20.6 58.26,19.743 U6.14 59.3,15.88 R7.2
PWM3_D: U3.13 U11.11 | length 40.2
  Top Layer w0.4: U11.11 29.95,26.05 31.2,27.3 34.161,27.3 34.561,26.9 36.48,26.9 37.73,28.15 43.319,28.15 43.469,28 54.407,28 55.207,28.8 v4(55.5,28.8)
  Bottom Layer w0.4: v4(55.5,28.8) 55,29.3 55,32.249 55.631,32.88 55.631,39.421 56.385,40.175 U3.13
PWM4: R6.2 U6.13 U11.3 | length 39.9
  Top Layer w0.4: U11.3 v2(26.14,20.36)
  Bottom Layer w0.4: v2(26.14,20.36) 26.72,20.94 29.338,20.94 29.598,21.2 57.651,21.2 60.8,18.051 U6.13 R6.2
PWM4_D: U4.13 U11.14 | length 23.6
  Top Layer w0.4: U11.14 26.14,26.04 29.2,29.1 34.907,29.1 35.107,28.9 v4(35.4,28.9) v4@35.4,28.868
  Bottom Layer w0.4: v4(35.4,28.9) 34.8,29.5 34.8,32.149 35.4,32.749 35.4,39.4 36.175,40.175 U4.13@36.531,40.175
PWM5: R5.2 U6.12 U12.3 | length 60.6
  Top Layer w0.4: v2(8,21) 8,21.26 U12.3
  Bottom Layer w0.4: v2(8,21) 8,21.02 8.28,21.3 22.402,21.3 22.642,21.54 29.089,21.54 29.349,21.8 57.9,21.8 62.78,16.92 U6.12 62.3,15.88 R5.2
PWM5_D: U5.13 U12.14 | length 21.5
  Top Layer w0.4: U12.14 8.04,27.34 9.8,29.1 15.209,29.1 15.409,28.9 v4(15.7,28.9) v4@15.7,28.869
  Bottom Layer w0.4: v4(15.7,28.9) 15.4,29.2 15.4,32.049 16.031,32.68 16.031,39.421 16.785,40.175 U5.13
SCL: R9.2 U6.8 U8.22 | length 29.1
  Top Layer w0.4: U8.22 49.6,16.247 50.403,17.05 53.001,17.05 54.751,18.8 71.626,18.8 73.5,16.926 U6.8
  Bottom Layer w0.4: U6.8 74,16.42 R9.2
SDA: R8.2 U6.7 U8.23 | length 31.8
  Top Layer w0.4: U8.23 50.25,16.049 50.651,16.45 53.25,16.45 54.92,18.12 71.457,18.12 72.16,17.417 72.16,16.563 73.003,15.72 74.84,15.72 U6.7
  Bottom Layer w0.4: R8.2 75.5,16.38 U6.7
pads on no net: C9.0 C10.0 C11.0 C12.0 C13.0 C14.0 C15.0 C19.0 C20.0 C21.0 C22.0 C23.0 C24.0 C25.0 C30.0 C31.0 C32.0 C33.0 C34.0 C36.0 D1.0 J4.drill J6.3 J6.4 J6.drill J7.drill J8.drill J9.drill J10.drill J11.drill J12.drill LED3.0 R1.0 R2.0 R3.0 R4.0 R5.0 R6.0 R7.0 R8.0 R9.0 R12.0 R13.0 R15.0 R16.0 R17.0 R18.0 R19.0 R20.0 R21.0 R22.0 R23.0 R24.0 R25.0 R26.0 R27.0 R28.0 R29.0 R30.0 R31.0 R32.0 R33.0 R34.0 R35.0 R36.0 R37.0 U1.8 U2.8 U3.8 U4.8 U5.8 U6.3 U6.18 U6.28 U6.30 U7.5 U7.12 U8.1 U12.5 U12.6 U12.7 U12.10 U12.11 U12.12

## Polygon pours and split planes (outlines as drawn)
GND on Bottom Layer "Top Layer-No Net 1" (solid, remove dead copper, pour order 20): 0,0 90,0 90,3.5 86,3.5 86,15.5 90,15.5 90,22 0,22
PGND on Bottom Layer "Top Layer-No Net 1" (solid, remove dead copper, pour order 15): 100,50 100,23 0,23 0,50 100,50
NetM5_2_1 on Bottom Layer "Top Layer-No Net 1" (solid, remove dead copper, pour order 12): 16.4,37.3 20.4,37.3 20.4,50 10.5,50 10.5,46.5 17.2,46.5 18.1,45.6 18.1,39.4 16.4,39.4
NetM4_1_1 on Bottom Layer "Top Layer-No Net 1" (solid, remove dead copper, pour order 11): 24.2,37.3 20.4,37.3 20.4,50 30.3,50 30.3,46.5 23.4,46.5 22.5,45.6 22.5,39.3 24.2,39.3
NetM4_2_1 on Bottom Layer "Top Layer-No Net 1" (solid, remove dead copper, pour order 10): 36.2,37.2 40.2,37.2 40.2,50 30.3,50 30.3,46.5 37,46.5 37.9,45.6 37.9,39.3 36.2,39.3
NetM3_1_1 on Bottom Layer "Top Layer-No Net 1" (solid, remove dead copper, pour order 9): 44,37.2 40.2,37.2 40.2,50 50.1,50 50.1,46.5 43.2,46.5 42.3,45.6 42.3,39.3 44,39.3
NetM3_2_1 on Bottom Layer "Top Layer-No Net 1" (solid, remove dead copper, pour order 8): 56,37.3 60,37.3 60,50 50.1,50 50.1,46.5 56.8,46.5 57.7,45.6 57.7,39.5 56,39.5
NetM2_1_1 on Bottom Layer "Top Layer-No Net 1" (solid, remove dead copper, pour order 7): 63.8,37.3 60,37.3 60,50 69.9,50 69.9,46.5 63,46.5 62.1,45.6 62.1,39.3 63.8,39.3
NetM2_2_1 on Bottom Layer "Top Layer-No Net 1" (solid, remove dead copper, pour order 5): 75.8,37.3 79.8,37.3 79.8,50 69.9,50 69.9,46.5 76.6,46.5 77.5,45.6 77.5,39.4 75.8,39.4
NetM1_2_1 on Bottom Layer "Top Layer-No Net 1" (solid, remove dead copper, pour order 3): 95.6,37.3 100,37.3 100,50 89.7,50 89.7,46.5 96.4,46.5 97.3,45.6 97.3,39.8 95.6,39.8
NetM1_1_1 on Bottom Layer "Top Layer-No Net 1" (solid, remove dead copper, pour order 4): 83.7,37.3 79.8,37.3 79.8,50 89.6,50 89.6,46.5 82.8,46.5 81.9,45.6 81.9,39.8 83.7,39.8
12V on Bottom Layer "Top Layer-No Net 1" (solid, remove dead copper, pour order 6): 95.5,37.3 100,37.3 100,23 0,23 0,37 4.74,37 4.74,34.5 2.9,34.5 2.9,28.2 18,28.2 18,35.7 16.2,35.7 16.2,37 24.5,37 24.5,34.5 22.6,34.5 22.6,28.2 37.9,28.2 37.9,35.7 36,35.7 36,37 44.2,37 44.2,34.5 42.5,34.5 42.5,28.2 57.6,28.2 57.6,35.8 55.9,35.8 55.9,37 64,37 64,34.5 62.3,34.5 62.3,28.2 77.4,28.2 77.4,35.7 75.7,35.7 75.7,37 84,37 84,34.5 82,34.5 82,28.2 97.3,28.2 97.3,36 95.5,36
NetM5_1_1 on Bottom Layer "Top Layer-No Net 1" (solid, remove dead copper, pour order 13): 4.4,37.2 0,37.2 0,50 10.5,50 10.5,46.5 3.5,46.5 2.6,45.6 2.6,39.3 4.4,39.3
GND on Top Layer "Top Layer-No Net 1" (solid, remove dead copper, pour order 19): 0,0 0,22 90,22 90,15.5 86,15.5 86,3.5 90,3.5 90,0
Net16V_1 on Top Layer "Top Layer-No Net 1" (solid, remove dead copper, pour order 18): 0,11 5,11 5,9.5 9,9.5 9,14.5 0,14.5 0,11
Net19V_IN_1 on Top Layer "Top Layer-No Net 1" (solid, remove dead copper, pour order 17): 0,0 0,3.5 5,3.5 5,5.5 9,5.5 9,0 0,0
PC_PWR on Top Layer "Top Layer-No Net 1" (solid, remove dead copper, pour order 16): 16.5,0 10,0 10,13 14.5,13 16.5,11
PGND on Top Layer "Top Layer-No Net 1" (solid, remove dead copper, pour order 14): 99.994,50.006 -0.006,50.006 -0.006,29.956 99.994,29.956

## Keep-outs
Keep-Out Layer:
  lines w0.2: 0,0 100,0 ; 0,0 0,50 100,50 100,0 ; 0,0 100,0

## Silkscreen, mask and mechanical layers (free items; w line width, h text height)
Top Overlay:
  text "v0.1" at 14,14.5 h1.6
Bottom Overlay:
  text "M5" at 9.1,49 h1.6 r180
  text "M4" at 28.9,49 h1.6 r180
  text "M3" at 48.7,49 h1.6 r180
  text "M2" at 68.5,49 h1.6 r180
  text "M1" at 88.3,49 h1.6 r180
  text "+" at 93,24.5 h2
  text "BTN" at 23.6,10.2 h1.6 r180
  text "BALL" at 31.5,10.2 h1.6 r180
  text "ENC5" at 40.1,10.2 h1.6 r180
  text "ENC4" at 48.7,10.2 h1.6 r180
  text "ENC3" at 57.4,10.2 h1.6 r180
  text "ENC2" at 66,10.2 h1.6 r180
  text "ENC1" at 74.6,10.2 h1.6 r180
Top Solder:
  region: 85.6,43.6 85.6,32.1 93.6,32.1 93.6,36.1 91.6,36.1 91.6,43.6
  region: 73.8,43.6 65.8,43.6 65.8,31 73.8,31
  region: 54,43.6 46,43.6 46,31.2 54,31.2
  region: 34.2,43.6 26.2,43.6 26.2,31 34.2,31
  region: 14.4,43.6 6.4,43.6 6.4,31 14.4,31